# Altium PCB [BB]PowerSuppyandMotorDriver_REV1.2.PcbDoc
Units mm, origin at the board's own origin, x right, y up, seen from the top; angles counter-clockwise.
Board outline 84.18 x 75.54 mm, 2 copper layers (Top Layer, Bottom Layer); 93 components, 73 nets, 295 pads, 202 vias.
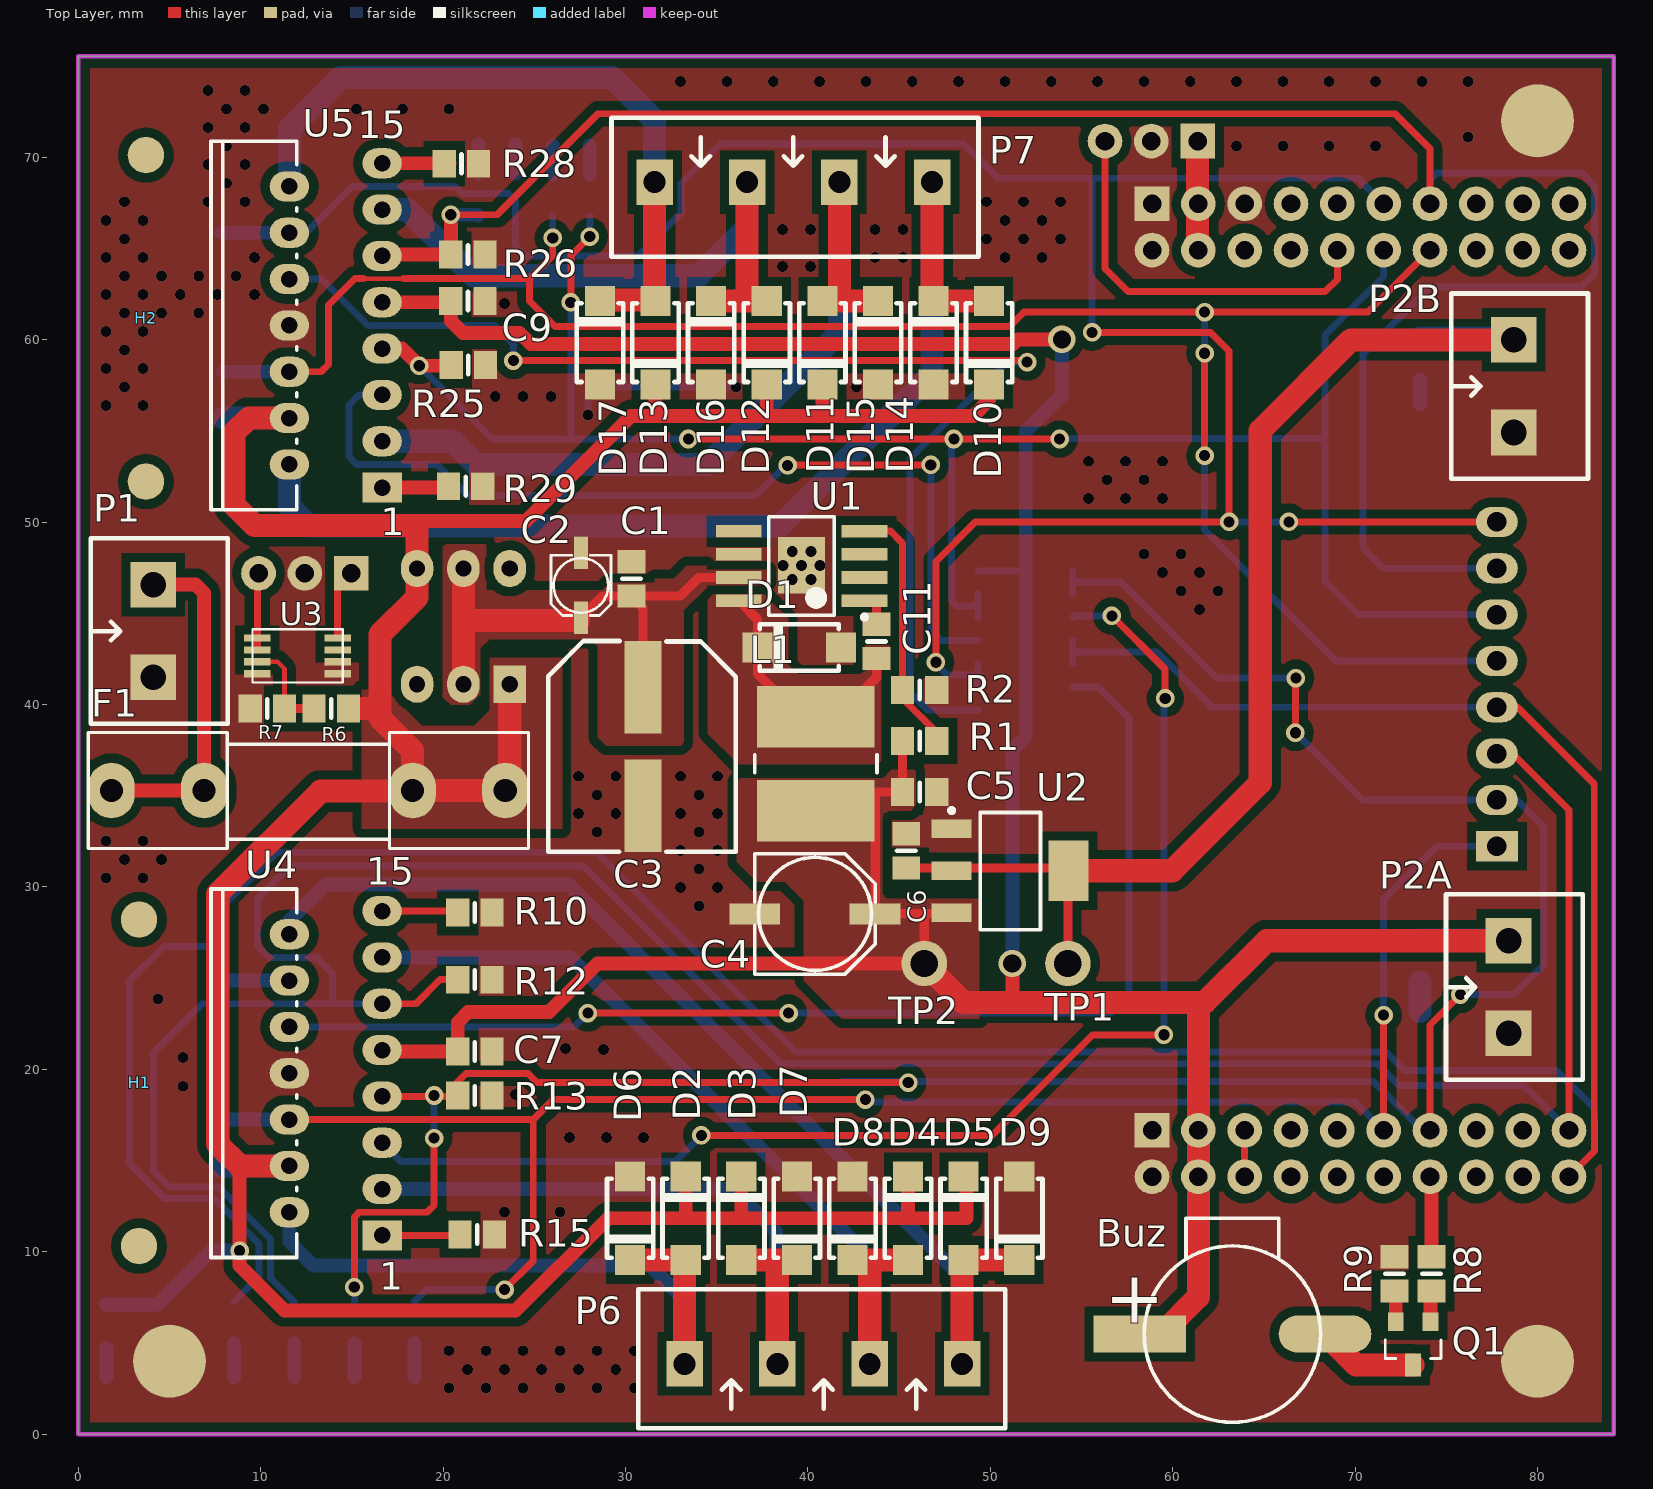
[diagram p0: Top Layer view]
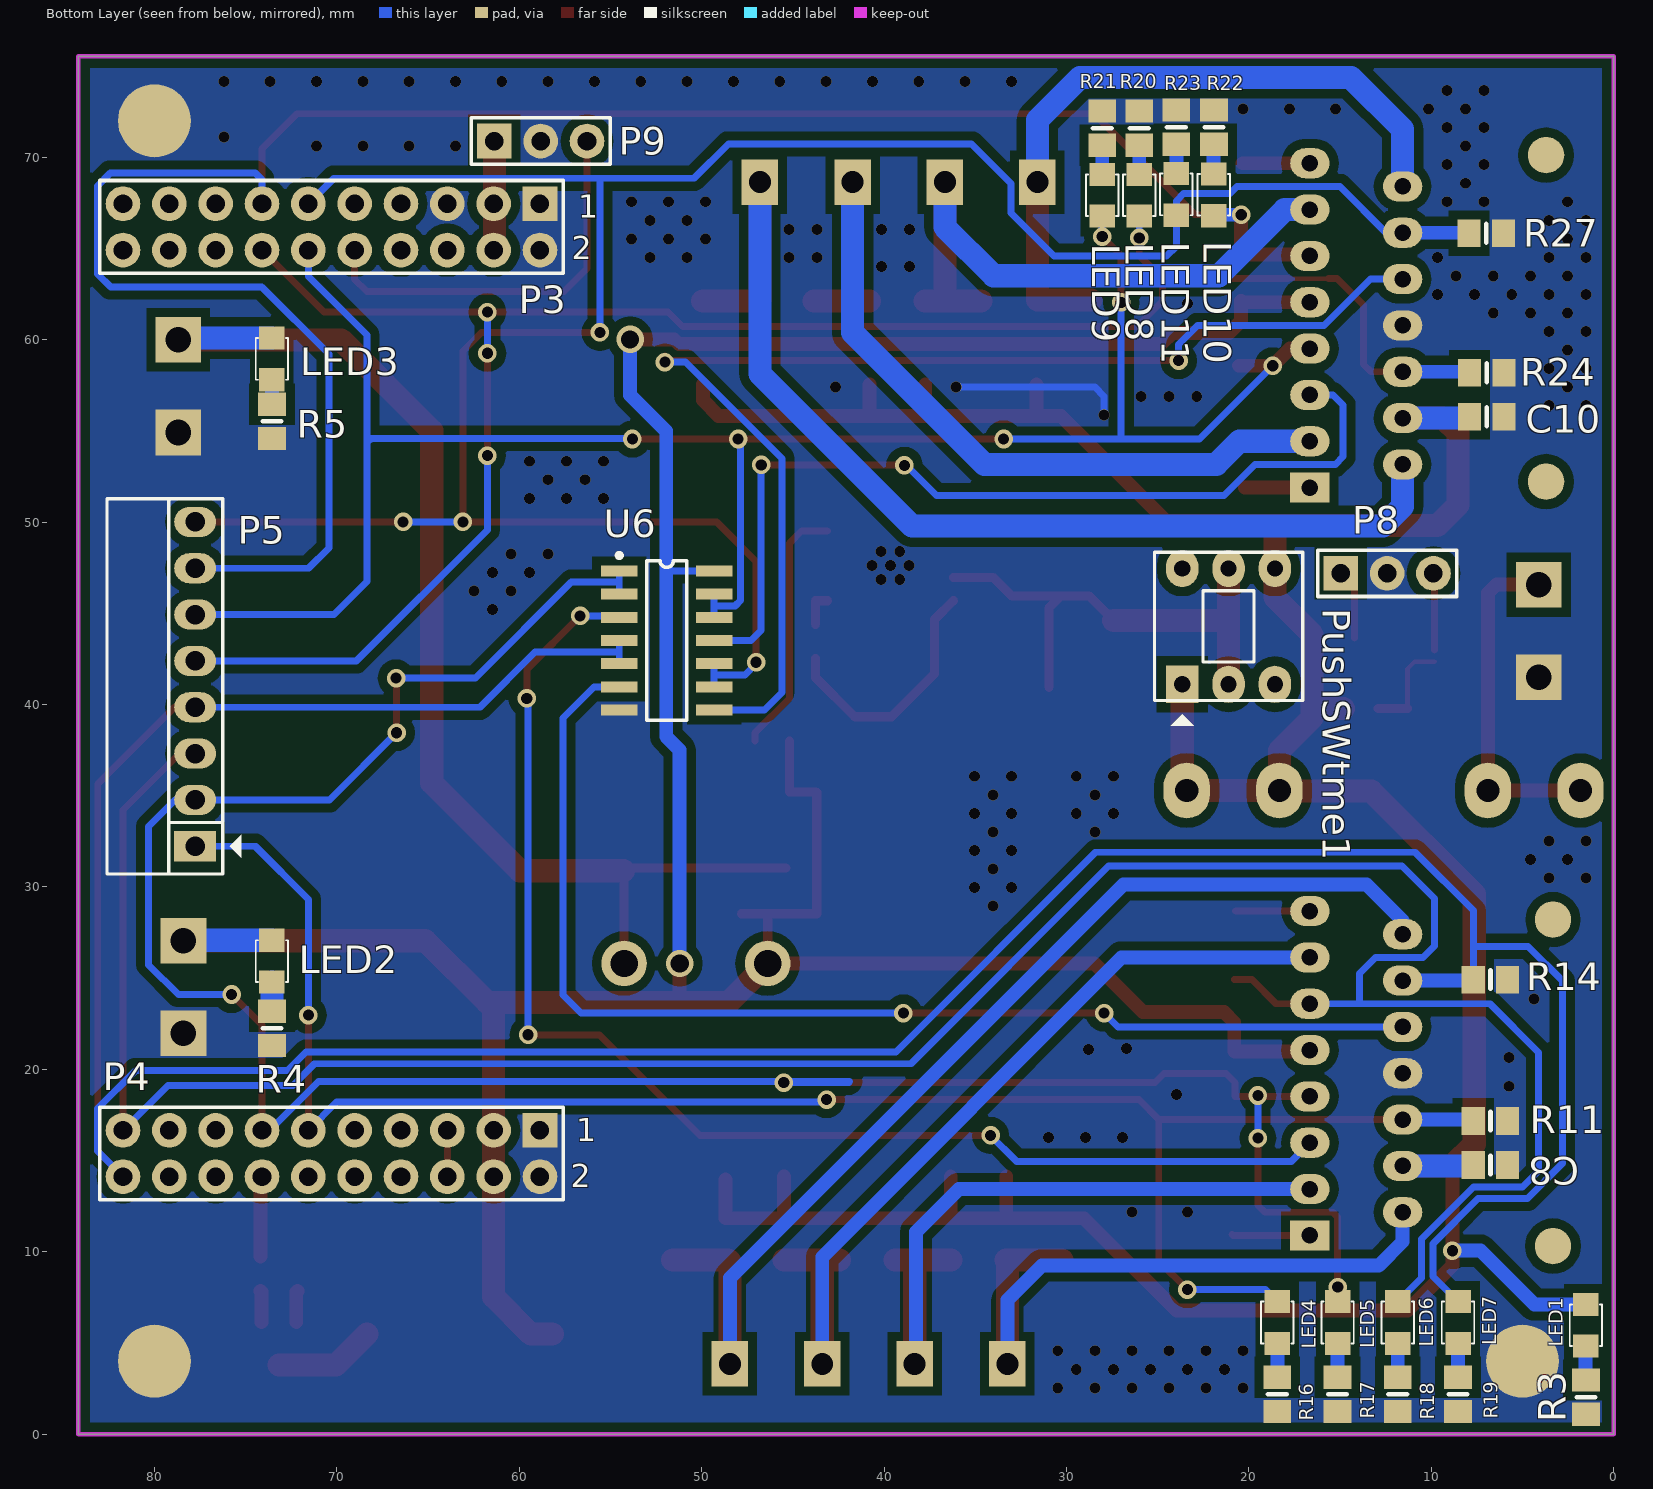
[diagram p1: Bottom Layer view, seen from below]
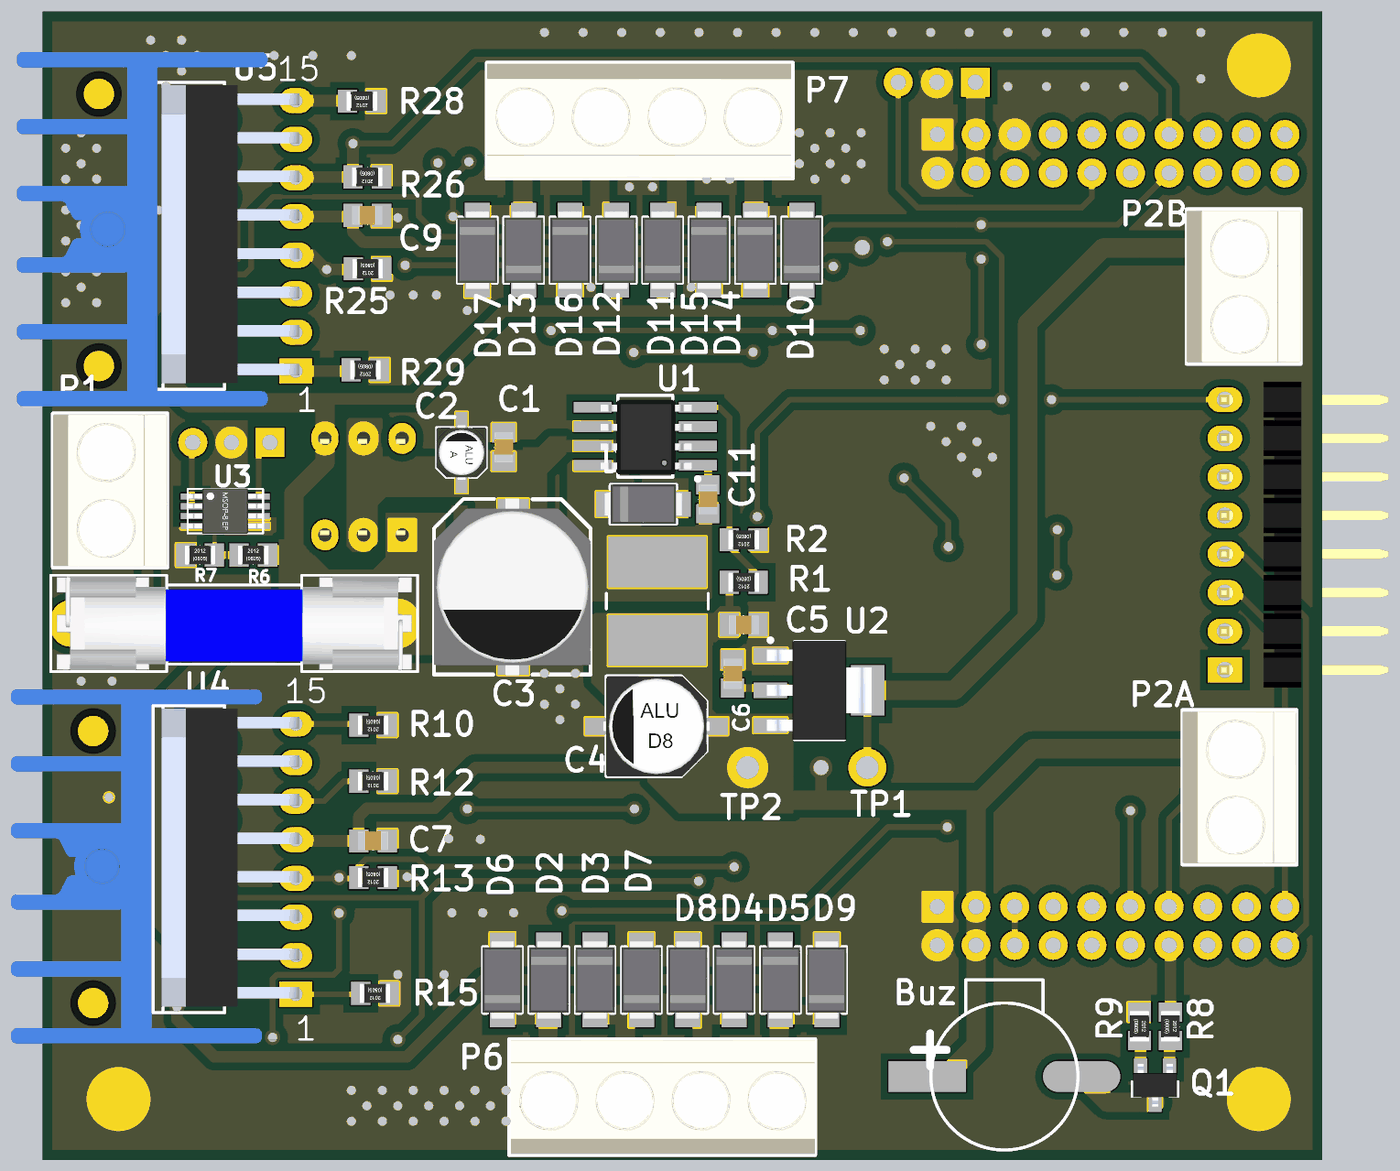
[diagram p2: 3D render of the assembled board from above, using the file's embedded part models]
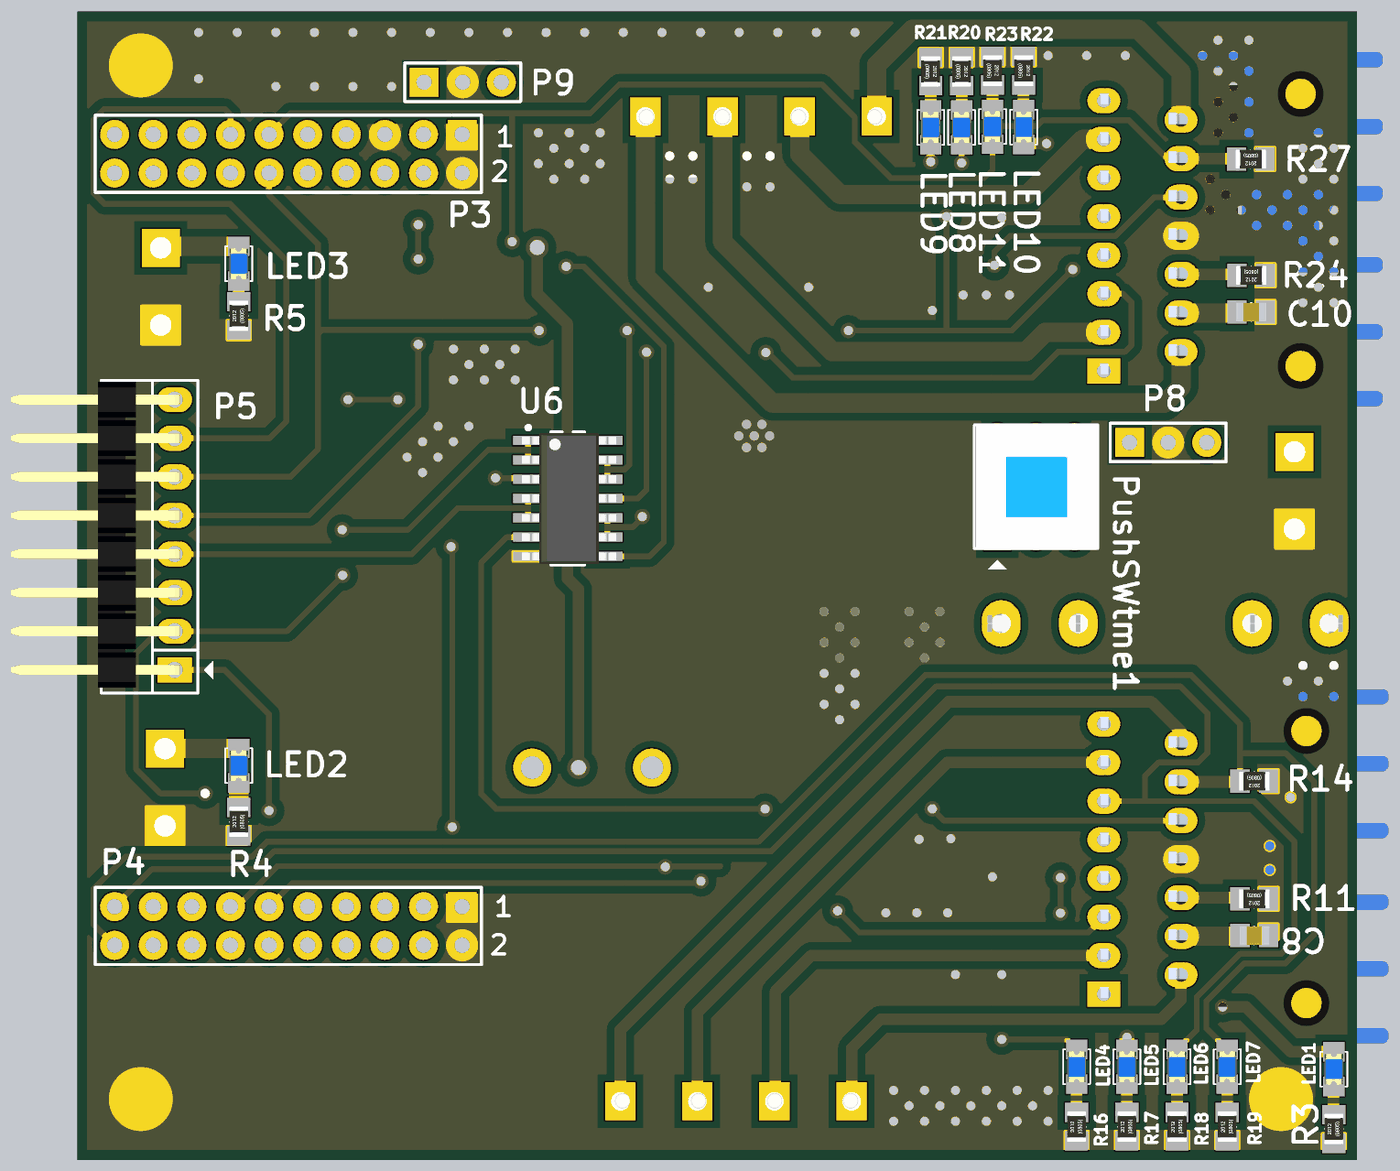
[diagram p3: 3D render of the assembled board from below, using the file's embedded part models]

## Layer stack, top to bottom
Top Solder: solder mask 0.0102, Solder Resist, Dk 3.5
Top Layer: signal copper 0.0356
Dielectric 1: dielectric 0.32, FR-4, Dk 4.8
Bottom Layer: signal copper 0.0356
Bottom Solder: solder mask 0.0102, Solder Resist, Dk 3.5

## Board outline
0,0 0,75.54 84.176,75.54 84.176,0

## Design rules (kind name [scope] priority, off if disabled: settings)
Clearance [All] p1: gap=0.254 except(0.508: Arc-Poly Arc-Region Track-Poly Track-Region SMDPad-Poly SMDPad-Region THPad-Poly THPad-Region Via-Poly Via-Region Fill-Poly Fill-Region Poly-Poly Poly-Region Region-Region)
ComponentClearance [All] p1 off: gap=0.254 collisioncheckmode=3 verticalgap=0.254 showdistances=FALSE
PlaneConnect [All] p1: planeconnectstyle=Direct reliefexpansion=0.508 reliefentries=4 reliefconductorwidth=0.254 reliefairgap=0.254
PolygonConnect [All] p1: connectstyle=Direct reliefconductorwidth=0.254 reliefentries=4 polygonreliefangle="90 Angle" airgapwidth=0.254
RoutingVias [All] p1: holewidth=1.27 width=0.254 viastyle="Through Hole" minholewidth=0.61 minwidth=1.016 maxholewidth=1 maxwidth=2
SolderMaskExpansion [All] p1: expansion=0.102
Width [All] p1: maxlimit=2.54 minlimit=0.254 preferedwidth=0.254 minimp=50.000000 maximp=50.000000 favimp=50.000000
28 further rules are at their usual default settings.

## Components (designator, comment, footprint, x,y, rotation, side; value= is the part's Value field where it differs from the comment)
Buz "Buzzer" "BUZZER SMD" 60.732,5.486 r0 top
C1 "100nF-10%" C0805 30.328,46.888 r270 top
C2 "3.3µF" SM/C_ALU_SA 27.56,44.755 r90 top
C3 "330uF/35V" "Size G" 30.963,40.945 r270 top
C4 "220uF-6.3V" SM/C_ALU_SD8 43.689,28.524 r180 top
C5 "100nF-10%" C0805 46.127,35.204 r180 top
C6 "100nF-10%" C0805 45.391,31.979 r270 top
C7 "100nF-10%" C0805 21.743,20.98 r0 top
C8 "100nF-10%" C0805 6.757,14.757 r0 bottom
C9 "100nF-10%" C0805 21.362,62.128 r0 top
C10 "100nF-10%" C0805 6.96,55.778 r0 bottom
C11 "10nF-10%" C0805 43.765,43.459 r270 top
D1 "SS34" "DO-214AC (SMA)" 41.809,43.129 r180 top
D2 "SS34" "DO-214AC (SMA)" 33.3,9.55 r90 top
D3 "SS34" "DO-214AC (SMA)" 36.348,9.55 r90 top
D4 "SS34" "DO-214AC (SMA)" 45.492,9.55 r90 top
D5 "SS34" "DO-214AC (SMA)" 48.54,9.55 r90 top
D6 "SS14" "DO-214AC (SMA)" 30.252,14.122 r270 top
D7 "SS14" "DO-214AC (SMA)" 39.396,14.122 r270 top
D8 "SS14" "DO-214AC (SMA)" 42.444,14.122 r270 top
D9 "SS14" "DO-214AC (SMA)" 51.588,14.122 r270 top
D10 "SS34" "DO-214AC (SMA)" 49.937,62.128 r270 top
D11 "SS34" "DO-214AC (SMA)" 40.793,62.128 r270 top
D12 "SS34" "DO-214AC (SMA)" 37.745,62.128 r270 top
D13 "SS34" "DO-214AC (SMA)" 31.649,62.128 r270 top
D14 "SS14" "DO-214AC (SMA)" 46.889,57.556 r90 top
D15 "SS14" "DO-214AC (SMA)" 43.841,57.556 r90 top
D16 "SS14" "DO-214AC (SMA)" 34.697,57.556 r90 top
D17 "SS14" "DO-214AC (SMA)" 28.601,57.556 r90 top
F1 "Fuse" FUSE 12.615,35.286 r0 top locked
H1 "Heatsink TO220" "HEATSINK TO-220" 3.328,10.312 r90 top locked
H2 "Heatsink TO220" "HEATSINK TO-220" 3.709,52.222 r90 top locked
L1 "10uH/2A" L6D38 40.438,36.754 r270 top
LED1 "LED SMD" SM-LED-0805-Blue 1.524,7.112 r270 bottom
LED2 "LED SMD" SM-LED-0805-Blue 73.559,27.076 r270 bottom
LED3 "LED SMD" SM-LED-0805-Blue 73.559,60.096 r270 bottom
LED4 "LED SMD" SM-LED-0805-Blue 18.441,7.264 r270 bottom
LED5 "LED SMD" SM-LED-0805-Blue 15.139,7.264 r270 bottom
LED6 "LED SMD" SM-LED-0805-Blue 11.837,7.264 r270 bottom
LED7 "LED SMD" SM-LED-0805-Blue 8.535,7.264 r270 bottom
LED8 "LED SMD" SM-LED-0805-Blue 26.01,66.777 r90 bottom
LED9 "LED SMD" SM-LED-0805-Blue 28.042,66.777 r90 bottom
LED10 "LED SMD" SM-LED-0805-Blue 21.921,66.802 r90 bottom
LED11 "LED SMD" SM-LED-0805-Blue 23.978,66.827 r90 bottom
P1 "Domino 2" "DOMINO 2- 5MM" 4.115,44.036 r90 top locked
P2A "Domino 2" "DOMINO 2- 5MM" 78.411,24.511 r90 top
P2B "Domino 2" "DOMINO 2- 5MM" 78.69,57.455 r90 top
P3 "Header 2X10" "Header 2X10" 58.865,67.456 r0 bottom locked
P4 "Header 2X10" "Header 2X10" 58.865,16.656 r0 bottom locked
P5 "Header 8H" JP8H 77.776,32.233 r90 bottom
P6 "Domino 4" "DOMINO 4 -5mm" 33.242,3.85 r0 top
P7 "Domino 4" "DOMINO 4 -5mm" 46.809,68.642 r180 top
P8 "Header 1X3" "Header 1X3" 14.961,47.193 r180 bottom
P9 "Header 1X3" "Header 1X3" 61.367,70.891 r180 bottom
PushSWtme1 "SW?" "PUSH SW" 21.115,44.286 r90 bottom locked
Q1 "NPN Transistor" SC-43-BCE 73.178,4.978 r180 top
R1 "10k-5%" R0805 46.127,37.998 r180 top
R2 "3.3k-5%" R0805 46.127,40.792 r180 top
R3 "1.5k-5%" R0805 1.524,2.032 r90 bottom
R4 "560k-5%" R0805 73.559,22.25 r90 bottom
R5 "220R-5%" R0805 73.559,55.524 r90 bottom
R6 "100k-5%" R0805 13.865,39.786 r0 top
R7 "12k-5%" R0805 10.365,39.786 r0 top
R8 "1k-5%" R0805 74.194,8.788 r270 top
R9 "1k-5%" R0805 72.162,8.788 r270 top
R10 "0.56R-1%" R0805 21.743,28.6 r180 top
R11 "100k-5%" R0805 6.757,17.17 r0 bottom
R12 "100k-5%" R0805 21.743,24.917 r180 top
R13 "100k-5%" R0805 21.743,18.567 r180 top
R14 "100k-5%" R0805 6.757,24.917 r0 bottom
R15 "0.56R-1%" R0805 21.87,10.947 r180 top
R16 "560k-5%" R0805 18.441,2.184 r90 bottom
R17 "220R-5%" R0805 15.139,2.184 r90 bottom
R18 "1.5k-5%" R0805 11.837,2.184 r90 bottom
R19 "560k-5%" R0805 8.535,2.184 r90 bottom
R20 "220R-5%" R0805 26.01,71.603 r270 bottom
R21 "1.5k-5%" R0805 28.042,71.603 r270 bottom
R22 "560k-5%" R0805 21.921,71.653 r270 bottom
R23 "220R-5%" R0805 23.978,71.653 r270 bottom
R24 "100k-5%" R0805 6.96,58.191 r0 bottom
R25 "100k-5%" R0805 21.388,58.623 r180 top
R26 "100k-5%" R0805 21.362,64.668 r180 top
R27 "100k-5%" R0805 6.986,65.837 r0 bottom
R28 "0.56R-1%" R0805 21.007,69.647 r180 top
R29 "0.56R-1%" R0805 21.235,51.968 r180 top
TP1 "Test Point" "Hole 1.5mm" 54.255,25.806 r0 top
TP2 "Test Point" "Hole 1.5mm" 46.381,25.806 r0 top
U1 "TPS54xx" "SOIC-8 POWERPAD" 39.65,47.625 r180 top
U2 "LM1117-3.3V" SOT223-4N 51.08,30.886 r270 top
U3 "LMV358IDGKR" MSOP-8 12.115,42.786 r270 top
U4 "L298" DIP15SL2 14.115,19.786 r90 top locked
U5 "L298" DIP15SL2 14.115,60.786 r90 top locked
U6 "7400" SO14-150mil 51.918,43.51 r270 bottom

## Footprints (in the part's own frame and the unit in brackets; to place one, negate y for a bottom-side part, rotate by r counter-clockwise, add the part's x,y. Pads: shape width x height; smd on the part's side, far side on the other; paste and mask are expansions set on the pad)
"BUZZER SMD" [mil]
  rect 200x80 smd: 1(-100,0)
  oval 200x80 smd: 2(300,0)
  silkscreen extent -90,-190 290,250
C0805 [mil]
  rect 50x60 smd: 1(-37,0) 2(37,0)
  silkscreen extent 0,-20 0,20, body extent -39,-24 39,25, height 24
DIP15SL2 [mil] "TO, Thru-Hole, Vertical, Heatsink Mounted; 15 Bent Staggered Leads; Pitch 1.27 mm"
  rect 65x85 hole 35.43: 1(-350,-100)
  oval 65x85 hole 35.43: 2(-300,100) 3(-250,-100) 4(-200,100) 5(-150,-100) 6(-100,100) 7(-50,-100) 8(0,100) 9(50,-100) 10(100,100) 11(150,-100) 12(200,100) 13(250,-100) 14(300,100) 15(350,-100)
  silkscreen extent -398,84 398,269, body extent -382,-110 390,247, height 895
"DO-214AC (SMA)" [mil]
  rect 65x65 smd: 1(0,0) 2(180,0)
  silkscreen extent 5,-50 175,50, body extent -12,-51 192,51, height 95
"DOMINO 2- 5MM" [mm]
  rect 2.5x2.5 hole 1.4: 1(-2.54,0) 2(2.54,0)
  silkscreen extent -5.08,-4.08 5.08,3.43, body extent -5,-4.07 5,3.43, height 10
"DOMINO 4 -5mm" [mm]
  rect 2x2.5 hole 1.2: 1(0,0) 2(5.08,0) 3(10.147,0) 4(15.215,0)
  silkscreen extent -2.54,-3.53 17.58,4.09, body extent -2.43,-3.46 17.57,4.04, height 10
FUSE [mil] "De Fuse"
  oval 100x120 hole 50: 1(-425,0) 1(-225,0) 2(225,0) 2(425,0)
  silkscreen extent -475,-125 475,125, body extent -460,-122 460,122, height 378
"Header 1X3" [mil] "Connector; Header; 3 Position"
  rect 75x75 hole 40: 1(0,0)
  round 75 hole 40: 2(100,0) 3(200,0)
  silkscreen extent -50,-50 250,50, body extent -50,-50 250,50, height 276
"Header 2X10" [mil] "Connector; Header; 10x2 Position"
  rect 75x75 hole 40: 1(0,0)
  round 75 hole 40: 2(0,100) 3(100,0) 4(100,100) 5(200,0) 6(200,100) 7(300,0) 8(300,100) 9(400,0) 10(400,100) 11(500,0) 12(500,100) 13(600,0) 14(600,100) 15(700,0) 16(700,100) 17(800,0) 18(800,100) 19(900,0) 20(900,100)
  silkscreen extent -50,-50 950,150, body extent -45,-55 950,150, height 59
"HEATSINK TO-220" [mm]
  round 2 all layers, no hole paste+1 mask+0.5: 0(0,0)
  round 2 all layers, no hole paste+0.5 mask+0.5: 1(17.9,0)
  body extent -2.65,-11.1 20.65,5.4, height 28.01
"Hole 1.5mm" [mm]
  round 2.5 hole 1.5: 0(0,0)
JP8H [mil]
  rect 65x90 hole 42: 1(0,0)
  oval 65x90 hole 42: 2(100,0) 3(200,0) 4(300,0) 5(400,0) 6(500,0) 7(600,0) 8(700,0)
  silkscreen extent -60,-100 750,190, body extent -46,-15 746,424, height 49
L6D38 [mm] "10uH/2A ±20% SMD 6.7x6.7x4mm Precision Wire Wound Inductor, 2-Leads, Body 6.55x6.55mm, IPC Low Density"
  rect 3.35x6.45 smd: 1(-2.575,0) 2(2.575,0)
  silkscreen extent -0.5,-3.35 0.5,3.35, body extent -3.35,-3.35 3.35,3.35, height 4
MSOP-8 [mm]
  rect 0.399x1.45 smd: 1(-0.857,-2.3) 2(-0.207,-2.3) 3(0.443,-2.3) 4(1.093,-2.3) 5(1.093,2.1) 6(0.443,2.1) 7(-0.207,2.1) 8(-0.857,2.1)
  silkscreen extent -1.35,-2.57 1.57,2.39, body extent -1.4,-2.6 1.6,2.4, height 1.01
"PUSH SW" [mil] "SW DTDP - 6Pin 260x300x300 mil"
  rect 80x70 hole 35: 1(-125,100)
  oval 80x70 hole 35: 2(-125,0) 3(-125,-100) 4(125,-100) 5(125,0) 6(125,100)
  silkscreen extent -215,-160 160,160, body extent -158,-159 156,155, height 532
R0805 [mil]
  rect 50x60 smd: 1(-37,0) 2(37,0)
  silkscreen extent 0,-20 0,20, body extent -39,-25 39,25, height 18
SC-43-BCE [mil]
  rect 34x40 smd: B(-37.5,-46.5) E(37.5,-46.5)
  rect 34x50 smd: C(0,46.5)
  silkscreen extent -60,-8 60,33, body extent -57,-52 57,58, height 41
"Size G" [mil]
  rect 200x80 smd: 1(0,0) 2(255.91,0)
  silkscreen extent -100,-205 355,200, body extent -100,-205 356,201, height 402
SM-LED-0805-Blue [mil]
  rect 50x55 smd: 1(0,0) 2(90,0)
  silkscreen extent 0,-35 90,35, body extent 5,-25 85,25, height 43
SM/C_ALU_SA [mil] "1uF -> 4.7uF"
  rect 70x30 smd: 1(0,0) 2(140,0)
  silkscreen extent 5,-65 135,65, body extent -1,-65 141,65, height 213
SM/C_ALU_SD8 [mil] "100uF -> 220uF"
  rect 110x45 smd: 1(0,0) 2(260,0)
  silkscreen extent 0,-130 260,130, body extent -8,-130 268,130, height 303
SO14-150mil [mm] "Small Outline; 14 Leads; Body Width 3.9 mm; Pitch 1.27 mm"
  rect 0.6x2 smd: 1(-3.81,-2.6) 2(-2.54,-2.6) 3(-1.27,-2.6) 4(0,-2.6) 5(1.27,-2.6) 6(2.54,-2.6) 7(3.81,-2.6) 8(3.81,2.6) 9(2.54,2.6) 10(1.27,2.6) 11(0,2.6) 12(-1.27,2.6) 13(-2.54,2.6) 14(-3.81,2.6)
  silkscreen extent -4.78,-2.72 4.38,1.1, body extent -4.32,-3 4.32,3.2, height 1.7
"SOIC-8 POWERPAD" [mm]
  rect 2.6x3.1 smd: 0(0,0)
  rect 2.5x0.7 smd: 1(-3.45,1.93) 2(-3.45,0.66) 3(-3.45,-0.61) 4(-3.45,-1.88) 5(3.45,-1.88) 6(3.45,-0.61) 7(3.45,0.66) 8(3.45,1.93)
  silkscreen extent -3.57,-2.67 1.8,2.96, body extent -3.05,-2.37 2.95,2.53, height 1.7
SOT223-4N [mm] "SOT223, 4-Leads, Body 6.5x3.5mm, Pitch 2.3mm, Lead Span 7mm, IPC Medium Density"
  rect 1x2.2 smd: 1(-2.3,-3.2) 2(0,-3.2) 3(2.3,-3.2)
  rect 3.3x2.2 smd: 4(0,3.2)
  silkscreen extent -3.42,-3.32 3.23,1.68, body extent -3.25,-3.43 3.25,3.46, height 1.72

## Part data
C1 C5 C6 C7 C8 C9 C10: library part 100nF-50V-C0805, "Non-Polarized Capacitor"
C2: library part 4.7uF-25V-Tantalum, "Tantalum Capacitor"
C3: library part C_ALU_330uF_35V, "CAP ALUM 330UF 20% 35V SMD"
C4: library part 220uF-6.3V-Tantalum, "Tantalum Capacitor"
C11: library part 10nF-50V-C0805, "Non-Polarized Capacitor"
D1 D2 D3 D4 D5 D6 D7 D8 D9 D10 D11 D12 D13 D14 D15 D16 D17: library part Diode_SS14, "DIODE SCHOTTKY 40V 1A DO214AC"
H1 H2: "Heatsink-231625W T?n nhi?t Nhôm ki?u TO-220 / Multiwatt, 23x16x25mm"
L1: library part L6D38-100M, "10uH/2A ±20% SMD 6.7x6.7x4mm Inductor"
LED1 LED2 LED3 LED4 LED5 LED6 LED7 LED8 LED9 LED10 LED11: library part LED-SMD-0805
P1 P2A P2B: "Domino, 2-Pin"
P3 P4: "Header, 10-Pin, Dual row"
P5: "Header, 8-Pin, Right Angle"
P6 P7: "Domino 4-Pin"
P8 P9: "Header, 3-Pin"
PushSWtme1: library part PushSWtme, "Push SW 8x8 mm latching ON/OFF"
R1: library part 10k-5%-R0805, "RES 10k OHM 1/8W 5% 0805 SMD"
R2: library part 3.3k-5%-R0805, "RES 3.3k OHM 1/8W 5% 0805 SMD"
R3 R18 R21: library part 1.5k-5%-R0805, "RES 1.5k OHM 1/8W 5% 0805 SMD"
R4 R16 R19 R22: library part 560k-5%-R0603, "RES 560k OHM 1/10W 5% 0603 SMD"
R5 R17 R20 R23: library part 220R-5%-R0805, "RES 220 OHM 1/8W 5% 0805 SMD"
R6 R11 R12 R13 R14 R24 R25 R26 R27: library part 100k-5%-R0805, "RES 100k OHM 1/8W 5% 0805 SMD"
R7: library part 12k-5%-R0805, "RES 12k OHM 1/8W 5% 0805 SMD"
R8 R9: library part 1k-5%-R0805, "RES 1k OHM 1/8W 5% 0805 SMD"
R10 R15 R28 R29: library part 0.56R-1%-R0603, "RES 0.56 OHM 1/10W 1% 0603 SMD"
U1: "IC REG BUCK ADJ 1A 8SOIC"
U2: "800mA Low-Dropout Linear Regulator"
U4 U5: "Dual Full-H Driver"
U6: "Quad 2-Input NAND Gate"

## Free pads (board coordinates)
  round 4 all layers, no hole paste+0.4: 0(80,72) 1(5,4) 1(80,4)

## Via types
v1: diameter 0.6, hole 0.6, Top Layer to Bottom Layer, tented both sides, 161 vias
v2: diameter 1.016, hole 0.61, Top Layer to Bottom Layer, tented both sides, 36 vias
v3: diameter 0.6, hole 0.6, Top Layer to Bottom Layer, 3 vias
v4: diameter 1.5, hole 1, Top Layer to Bottom Layer, tented both sides, 2 vias

## Nets (pads, with @x,y where several pads share a name; then routed paths per layer and width w, separated by ;. In a path a pad name is that pad's centre, name@x,y a point inside that pad or via, vN(x,y) a via of type N, cw(c..) or ccw(c..) an arc to the next point about the centre after c; other vN are vias at no path point)
3V: P4.5 P4.6 | length 2.5
  Top Layer w0.381: P4.6 P4.5
+3V3: C6.2 LED3.1 P2B.2 TP1.0 U2.2 U2.4 | length 66.6
  Top Layer w0.508: C6.2 U2.4@54.128,31.039 ; TP1.0 54.255,30.861 U2.4
  Top Layer w1.27: U2.4 59.97,30.886 64.796,35.712 64.796,55.016 69.775,59.995 P2B.2
  Bottom Layer w1.27: LED3.1 P2B.2@78.588,60.096
+24VDC: C1.2 C2.1 C3.1 PushSWtme1.2 PushSWtme1.5 U1.7 | length 27.7
  Top Layer w0.508: C2.1@27.407,44.602 C2.1 28.754,45.949 C1.2 ; C3.1 30.963,45.314 C1.2 ; U1.7 34.011,46.965 32.995,45.949 C1.2
  Top Layer w1.27: PushSWtme1.2 21.115,44.602 ; PushSWtme1.5 21.115,44.602 ; C2.1@27.407,44.602 21.115,44.602
DIRCTLMOTORA: LED5.1 P4.13 P5.2 R13.2 U4.7 U6.1 U6.2 | length 137.7
  Top Layer w0.381: v2(15.131,8.06) 15.131,11.906 15.392,12.166 19.127,12.166 19.508,12.548 v2(19.508,16.231) ; U4.7 v2@19.457,18.516 ; v2(19.508,18.567) v2@19.457,18.516 ; v2(45.5,19.275) 45.484,19.291 25.147,19.291 24.664,19.774 21.248,19.774 20.752,19.278 20.752,18.516 v2@19.457,18.516 ; v2(66.727,38.456) 66.727,41.427 v2(66.752,41.453) ; P4.13 74.105,22.441 v2(75.769,24.105)
  Bottom Layer w0.381: v2(15.131,8.06) 15.131,7.272 LED5.1 ; v2(19.508,16.231) v2(19.508,18.567) ; v2(45.5,19.275) 45.484,19.291 41.923,19.291 41.885,19.329 71.019,19.329 73.692,16.656 P4.13 ; U6.2 54.518,46.711 ; U6.1 54.518,46.711 ; v2(66.727,38.456) 70.41,34.773 P5.2 78.868,34.773 80.316,33.325 80.316,25.73 78.69,24.105 v2(75.769,24.105) ; v2(66.752,41.453) 62.409,41.453 57.151,46.711 54.518,46.711
DIRCTLMOTORB: LED7.1 P4.20 P5.4 R14.2 U4.12 U6.4 U6.5 | length 177.8
  Top Layer w0.381: P5.4 78.893,39.853 83.11,35.636 83.11,17.26 83.122,17.248 83.122,15.513 P4.20
  Bottom Layer w0.381: R14.2 7.697,26.746 ; LED7.1 9.907,8.636 9.907,10.439 7.43,12.916 4.735,12.916 2.819,14.832 2.819,24.866 4.7,26.746 7.697,26.746 ; U6.5 54.518,42.875 ; U6.4 54.518,42.875 ; P5.4 62.155,39.853 59.132,42.875 54.518,42.875 ; P4.20 83.122,15.513 83.122,17.844 81.027,19.939 72.696,19.939 71.692,20.942 39.358,20.942 28.398,31.902 10.897,31.902 7.697,28.702 7.697,26.746
  Bottom Layer w0.762: R14.2@7.748,24.866 U4.12
DIRCTLMOTORC: LED9.1 P3.12 P5.6 R25.2 U5.7 U6.12 U6.13 | length 109.7
  Top Layer w0.381: v2(27.001,62.052) 27.001,64.618 v2(28.042,65.659) ; v2(33.453,54.559) v2(48.007,54.559) v2(53.798,54.559)
  Top Layer w0.762: U5.7 17.751,59.516 v2(18.695,58.572) R25.2@20.549,58.572
  Bottom Layer w0.381: v2(18.695,58.572) 22.708,54.559 v2(33.453,54.559) ; 27.001,54.635 v2(27.001,62.052) ; v2(28.042,65.659) LED9.1 ; v2(48.007,54.559) 47.874,54.426 47.874,45.7 48.159,45.415 49.318,45.415 ; U6.12 49.318,45.415 ; U6.13 49.318,45.415 ; v2(53.798,54.559) 53.836,54.597 68.111,54.597 68.352,54.356 ; P3.12 71.565,63.462 68.352,60.249 68.352,54.356 ; P5.6 70.156,44.933 68.352,46.736 68.352,54.356
DIRCTLMOTORD: LED11.1 P3.11 P5.8 R27.2 U5.12 U6.9 U6.10 | length 139.6
  Top Layer w0.381: v2(47.016,42.316) 47.016,47.854 49.175,50.013 v2(63.094,50.013) 63.094,59.385 62.078,60.401 v2(55.576,60.401) ; v2(66.371,50.013) P5.8
  Bottom Layer w0.381: U5.12 12.476,65.866 15.016,68.406 20.64,68.406 21.038,68.008 23.585,68.008 23.978,67.615 LED11.1 23.978,65.126 24.512,64.592 30.683,64.592 33.039,66.948 33.039,68.573 35.205,70.739 48.54,70.739 50.426,68.853 55.576,68.853 ; v2(47.016,42.316) 47.016,42.24 47.626,41.631 49.318,41.631 U6.10 ; 49.242,41.631 49.318,41.554 U6.9 ; v2(55.576,60.401) 55.576,68.853 ; v2(63.094,50.013) v2(66.371,50.013) ; P3.11 70.168,68.853 55.576,68.853
  Bottom Layer w0.762: R27.2@7.845,65.866 U5.12
GND: C1.1 C2.2 C3.2 C4.2 C5.1 C6.1 C7.2 C8.1 C9.2 C10.1 D1.1 D6.1 D7.1 D8.1 D9.1 D14.1 D15.1 D16.1 D17.1 P1.1 P2A.1 P2B.1 P3.1 P3.2 P3.5 P4.1 P4.2 P8.2 P9.2 pad.0 pad.1 R2.1 R3.1 R4.1 R5.1 R7.1 R9.1 R10.1 R11.1 R12.1 R13.1 R14.1 R15.1 R16.1 R17.1 R18.1 R19.1 R20.1 R21.1 R22.1 R23.1 R24.1 R25.1 R26.1 R27.1 R28.1 R29.1 U1.0 U1.6 U2.1 U3.4 U3.5 U3.6 U4.8 U5.8 U6.7 | length 9.4
  Bottom Layer w0.381: v1(27.94,55.88) 27.94,56.896 28.448,57.404 v1(36.068,57.404)
  other v1: 20.32,2.54 22.352,2.54 24.384,2.54 26.416,2.54 28.448,2.54 30.48,2.54 21.336,3.556 23.368,3.556 25.4,3.556 27.432,3.556 29.464,3.556 20.32,4.572 22.352,4.572 24.384,4.572 26.416,4.572 28.448,4.572 30.48,4.572 23.368,12.192 26.416,12.192 26.924,16.256 28.956,16.256 30.988,16.256 23.978,18.618 28.804,21.082 26.721,21.133 34.036,28.956 33.02,29.972 35.052,29.972 1.524,30.48 3.556,30.48 34.036,30.988 2.54,31.496 4.572,31.496 33.02,32.004 35.052,32.004 1.524,32.512 3.556,32.512 28.448,33.02 34.036,33.02 27.432,34.036 29.464,34.036 33.02,34.036 35.052,34.036 28.448,35.052 34.036,35.052 27.432,36.068 29.464,36.068 33.02,36.068 35.052,36.068 61.468,45.212 60.452,46.228 62.484,46.228 39.142,46.863 40.158,46.863 59.436,47.244 61.468,47.244 38.634,47.625 39.65,47.625 40.666,47.625 58.42,48.26 60.452,48.26 39.142,48.387 40.158,48.387 55.372,51.308 57.404,51.308 59.436,51.308 56.388,52.324 58.42,52.324 55.372,53.34 57.404,53.34 59.436,53.34 1.524,56.388 3.556,56.388 22.86,56.896 24.384,56.896 25.908,56.896 2.54,57.404 42.672,57.404 1.524,58.42 3.556,58.42 2.54,59.436 1.524,60.452 3.556,60.452 2.54,61.468 4.572,61.468 6.604,61.468 23.368,61.976 1.524,62.484 3.556,62.484 5.588,62.484 7.62,62.484 9.652,62.484 2.54,63.5 4.572,63.5 6.604,63.5 8.636,63.5 38.608,64.008 40.132,64.008 1.524,64.516 3.556,64.516 9.652,64.516 43.688,64.516 45.212,64.516 50.8,64.516 52.832,64.516 2.54,65.532 49.784,65.532 51.816,65.532 53.848,65.532 38.608,66.04 40.132,66.04 43.688,66.04 45.212,66.04 1.524,66.548 3.556,66.548 50.8,66.548 52.832,66.548 2.54,67.564 7.112,67.564 9.144,67.564 49.784,67.564 51.816,67.564 53.848,67.564 8.128,68.58 7.112,69.596 9.144,69.596 8.128,70.612 63.5,70.612 66.04,70.612 68.58,70.612 71.12,70.612 76.2,71.12 7.112,71.628 9.144,71.628 8.128,72.644 10.16,72.644 15.24,72.644 17.78,72.644 20.32,72.644 7.112,73.66 9.144,73.66 33.02,74.168 35.56,74.168 38.1,74.168 40.64,74.168 43.18,74.168 45.72,74.168 48.26,74.168 50.8,74.168 53.34,74.168 55.88,74.168 58.42,74.168 60.96,74.168 63.5,74.168 66.04,74.168 68.58,74.168 71.12,74.168 73.66,74.168 76.2,74.168
  other v3: 5.74,19.075 5.74,20.65 4.369,23.851
NetBuz_2: Buz.2 Q1.C | length 5.5
  Top Layer w1.27: Buz.2 70.041,3.797 Q1.C
NetC11_1: C11.1 U1.1 | length 2
  Top Layer w0.508: U1.1 43.765,45.695 C11.1
NetC11_2: C11.2 D1.2 L1.1 U1.8 | length 13.9
  Top Layer w0.508: U1.8 37.237,44.658 D1.2 37.237,41.681 39.59,39.329 L1.1 41.616,39.329 43.765,41.478 C11.2
NetD2_1: D2.1 D6.2 P6.1 U4.2 | length 36.8
  Top Layer w1.27: D6.2 D2.1 ; P6.1 D2.1@33.242,9.492
  Bottom Layer w0.762: U4.2 11.575,10.549 12.879,9.246 31.344,9.246 33.242,7.348 P6.1
NetD3_1: D3.1 D7.2 P6.2 U4.3 | length 38.5
  Top Layer w1.27: D3.1 D7.2 ; P6.2 38.322,9.492
  Bottom Layer w0.762: U4.3 35.891,13.436 38.253,11.074 38.253,3.919 P6.2
NetD4_1: D4.1 D8.2 P6.3 U4.13 | length 48.1
  Top Layer w1.27: D8.2 D4.1 ; P6.3 43.389,9.48
  Bottom Layer w0.762: U4.13 26.976,26.136 43.389,9.723 P6.3
NetD5_1: D5.1 D9.2 P6.4 U4.14 | length 60.9
  Top Layer w1.27: P6.4 48.457,9.467 D5.1 D9.2
  Bottom Layer w0.762: U4.14 11.575,28.161 13.551,30.137 26.887,30.137 48.457,8.567 P6.4
NetD10_1: D10.1 D14.2 P7.1 U5.2 | length 61.5
  Top Layer w1.27: P7.1 46.809,62.208 D14.2 D10.1
  Bottom Layer w1.27: U5.2 11.575,50.859 12.65,49.784 38.456,49.784 46.809,58.137 P7.1
NetD11_1: D11.1 D15.2 P7.2 U5.3 | length 46.3
  Top Layer w1.27: D11.1 D15.2 ; 41.729,62.208 P7.2
  Bottom Layer w1.27: U5.3 20.52,54.436 21.794,53.162 34.497,53.162 41.729,60.395 P7.2
NetD12_1: D12.1 D16.2 P7.3 U5.13 | length 34.6
  Top Layer w1.27: D16.2 D12.1 ; 36.662,62.188 P7.3
  Bottom Layer w1.27: U5.13 18.031,67.136 21.654,63.513 33.999,63.513 36.662,66.176 P7.3
NetD13_1: D13.1 D17.2 P7.4 U5.14 | length 38.1
  Top Layer w1.27: D17.2@28.656,62.183 31.595,62.183 P7.4
  Bottom Layer w1.27: U5.14 11.575,71.544 14.403,74.371 29.262,74.371 31.595,72.038 P7.4
NetF1_1: F1.1 P1.2 | length 18.9
  Top Layer w0.762: F1.1@1.82,35.286 6.9,35.286 6.9,46.11 6.434,46.576 P1.2
NetLED1_2: LED1.2 R3.2 | length 1.6
  Bottom Layer w0.762: R3.2@1.55,3.124 LED1.2@1.55,4.724
NetLED2_2: LED2.2 R4.2 | length 1.6
  Bottom Layer w1.27: R4.2 LED2.2
NetLED3_2: LED3.2 R5.2 | length 1.3
  Bottom Layer w0.762: R5.2 LED3.2
NetLED4_2: LED4.2 R16.2 | length 1.9
  Bottom Layer w0.762: R16.2 LED4.2
NetLED5_2: LED5.2 R17.2 | length 1.9
  Bottom Layer w0.762: R17.2 LED5.2
NetLED6_2: LED6.2 R18.2 | length 1.9
  Bottom Layer w0.762: R18.2 LED6.2
NetLED7_2: LED7.2 R19.2 | length 1.9
  Bottom Layer w0.762: R19.2 LED7.2
NetLED8_2: LED8.2 R20.2 | length 1.6
  Bottom Layer w0.762: LED8.2 R20.2
NetLED9_2: LED9.2 R21.2 | length 1.6
  Bottom Layer w0.762: LED9.2 R21.2
NetLED10_2: LED10.2 R22.2 | length 1.6
  Bottom Layer w0.762: LED10.2@21.946,69.113 R22.2@21.946,70.714
NetLED11_2: LED11.2 R23.2 | length 1.6
  Bottom Layer w0.762: LED11.2 R23.2
NetP8_1: P8.1 U3.8 | length 3.9
  Top Layer w0.381: U3.8 14.216,46.447 P8.1
NetP8_3: P8.3 U3.1 U3.2 | length 4.2
  Top Layer w0.254: P8.3@9.816,47.127 P8.3
  Top Layer w0.381: U3.2 U3.1 P8.3@9.816,47.127
NetQ1_B: Q1.B R8.2 | length 1.7
  Top Layer w0.762: Q1.B 74.131,7.785 R8.2
NetQ1_E: Q1.E R9.2 | length 1.7
  Top Layer w0.762: R9.2 72.226,7.785 Q1.E
NetR1_1: R1.1 R2.2 U1.4 | length 14
  Top Layer w0.381: U1.4 44.527,49.505 45.187,48.844 R2.2 45.187,40.335 47.067,38.456 R1.1
NetR6_1: R6.1 R7.2 U3.3 | length 5.4
  Top Layer w0.254: U3.3 10.921,42.344 11.305,41.96 R7.2
  Top Layer w0.508: R7.2 R6.1
NetR10_2: R10.2 U4.15 | length 4.1
  Top Layer w0.381: U4.15 R10.2@20.727,28.676
NetR15_2: R15.2 U4.1 | length 4.3
  Top Layer w0.381: U4.1 20.879,10.896 R15.2
NetR28_2: R28.2 U5.15 | length 3.7
  Top Layer w0.762: U5.15 R28.2@20.35,69.676
NetR29_2: R29.2 U5.1 | length 3.6
  Top Layer w0.762: U5.1 R29.2@20.223,51.896
NetU4_5: U4.5 U6.3 | length 72.5
  Top Layer w0.381: v2(34.164,16.383) 50.09,16.383 55.601,21.895 v2(59.513,21.895) ; v2(56.668,44.856) 59.589,41.935 v2(59.589,40.335)
  Bottom Layer w0.381: U4.5 17.671,14.961 32.741,14.961 v2(34.164,16.383) ; U6.3 54.595,44.856 v2(56.668,44.856) ; v2(59.513,21.895) 59.513,40.259 v2(59.589,40.335)
NetU4_10: U4.10 U6.6 | length 65.7
  Top Layer w0.381: v2(27.941,23.089) v2(38.939,23.089)
  Bottom Layer w0.381: U4.10 27.179,22.326 v2(27.941,23.089) ; v2(38.939,23.089) 56.617,23.089 57.608,24.079 57.608,39.268 55.906,40.97 U6.6
NetU5_5: U5.5 U6.11 | length 50.4
  Top Layer w0.381: v2(38.888,53.111) 38.99,53.01 39.117,53.137 v2(46.737,53.137)
  Bottom Layer w0.381: U5.5 15.397,56.976 14.834,56.413 14.834,53.594 15.262,53.166 19.656,53.166 21.362,51.46 37.127,51.46 38.833,53.166 v2(38.888,53.111) ; v2(46.737,53.137) 46.737,44.069 47.296,43.51 U6.11
NetU5_10: U5.10 U6.8 | length 68.8
  Top Layer w0.381: v2(23.851,58.852) 51.715,58.852 51.741,58.826 52.02,59.106 v2(52.02,58.776)
  Bottom Layer w0.381: U5.10 13.335,63.326 15.875,60.786 22.81,60.786 23.851,59.745 v2(23.851,58.852) ; U6.8 46.559,39.7 45.594,40.665 45.594,53.493 50.876,58.776 v2(52.02,58.776)
NRST: P3.6
PA4: P3.16
PA5: P3.15
PA6: P3.18
PA7: P3.17
PC0: P3.8
PC1: P3.7
PC3: P3.9
PC4: P3.20
PC5: P3.19
PC13: P4.12
PC14: P4.9
PC15: P4.10
PE0: P4.17
PE1: P4.18
PE2: P4.15
PE3: P4.16
PH0: P4.7
PH1: P4.8
PWMBUZZER: P4.14 R8.1 | length 4.4
  Top Layer w0.762: P4.14 74.194,14.027 R8.1
READBATRVOLT: P3.10 P9.3 | length 22.1
  Top Layer w0.381: P9.3 56.287,63.906 57.557,62.636 68.352,62.636 69.025,63.309 P3.10
SPEEDCTLMOTORA: LED4.1 P4.11 P5.1 R11.2 U4.6 | length 100.2
  Top Layer w0.381: U4.6 24.943,17.246 ; v2(23.369,7.925) 24.943,9.499 24.943,17.246 ; v2(43.155,18.339) 26.036,18.339 24.943,17.246 ; P4.11 v2(71.565,22.974)
  Bottom Layer w0.381: LED4.1 19.102,7.925 v2(23.369,7.925) ; v2(43.155,18.339) 43.282,18.212 70.01,18.212 P4.11 ; v2(71.565,22.974) 71.565,29.324 74.474,32.233 P5.1
  Bottom Layer w0.762: R11.2@7.773,17.246 U4.6
SPEEDCTLMOTORB: LED6.1 P4.19 P5.3 R12.2 U4.11 | length 147.2
  Top Layer w0.381: U4.11 18.517,23.596 19.838,24.917 R12.2 ; P5.3 78.639,37.313 81.725,34.227 P4.19
  Bottom Layer w0.381: LED6.1 10.542,8.56 10.542,10.702 7.693,13.551 4.998,13.551 4.116,14.434 4.116,20.93 6.782,23.596 13.945,23.596 ; U4.11 13.945,23.596 ; P4.19 79.255,19.126 72.407,19.126 71.226,20.307 38.52,20.307 27.687,31.14 11.609,31.14 9.831,29.362 9.831,26.772 10.466,26.136 13.057,26.136 13.945,25.248 13.945,23.596
SPEEDCTLMOTORC: LED8.1 P3.14 P5.5 R24.2 U5.6 | length 108.7
  Top Layer w0.254: 15.647,63.348 17.832,63.348
  Top Layer w0.381: U5.6 13.315,58.246 13.717,58.649 13.717,61.9 15.165,63.348 15.647,63.348 ; 17.832,63.348 24.74,63.348 ; v2(26.01,65.583) 26.01,64.618 24.74,63.348 ; v2(61.748,53.645) v2(61.748,59.258) ; P3.14 70.708,61.519 51.841,61.519 51.053,60.731 26.137,60.731 24.74,62.128 24.74,63.348
  Bottom Layer w0.381: v2(26.01,65.583) LED8.1 ; v2(61.748,53.645) 61.748,49.581 68.936,42.393 P5.5 ; v2(61.748,59.258) 61.672,59.334 61.748,59.411 v2(61.748,61.519)
  Bottom Layer w0.762: R24.2@7.955,58.246 U5.6
SPEEDCTLMOTORD: LED10.1 P3.13 P5.7 R26.2 U5.11 | length 115.7
  Top Layer w0.381: v2(20.422,66.853) 22.962,66.853 28.5,72.39 72.188,72.39 74.105,70.472 P3.13
  Top Layer w0.762: U5.11@16.727,64.668 R26.2 v2(20.422,66.853)
  Bottom Layer w0.381: P3.13 74.105,68.77 74.474,69.139 82.424,69.139 83.122,68.44 83.122,63.614 82.398,62.89 74.118,62.89 70.435,59.207 70.435,48.59 71.553,47.473 P5.7
  Bottom Layer w0.762: v2(20.422,66.853) 21.87,66.853 LED10.1
VCC: Buz.1 C4.1 C5.2 C7.1 C9.1 L1.2 LED2.1 P2A.2 P4.3 P4.4 R1.2 TP2.0 U2.3 U4.9 U5.9 U6.14 | length 188.7
  Top Layer w0.508: R1.2 C5.2 43.714,35.204 43.689,35.179 C4.1 46.381,28.524 ; TP2.0 46.381,28.524 ; U2.3@47.818,28.524 46.381,28.524
  Top Layer w0.762: U5.9 C9.1@20.35,62.056 ; U4.9@16.731,20.98 C7.1 20.803,22.581 21.362,23.139 25.807,23.139 28.474,25.806 TP2.0 ; C9.1 20.422,61.036 21.083,60.376 24.196,60.376 24.806,59.766 51.255,59.766 51.509,60.02 v4(53.925,60.02) ; 51.207,23.673 v4(51.207,25.806)
  Top Layer w1.27: TP2.0 48.515,23.673 51.207,23.673 53.364,23.673 53.369,23.667 61.768,23.667 65.152,27.051 P2A.2 ; Buz.1 59.361,5.486 61.405,7.531 P4.4 P4.3 61.405,23.66
  Bottom Layer w0.381: U6.14 51.893,47.32
  Bottom Layer w0.762: v4(51.207,25.806) 51.207,37.516 51.944,38.252 51.944,54.991 53.925,56.972 v4(53.925,60.02)
  Bottom Layer w1.27: LED2.1 P2A.2@78.385,27.076
VDD: P3.3 P3.4 P9.1 | length 6
  Top Layer w1.27: P9.1 61.367,64.954 P3.4
VIN: C8.2 C10.2 D2.2 D3.2 D4.2 D5.2 D10.2 D11.2 D12.2 D13.2 F1.2 LED1.1 PushSWtme1.1 PushSWtme1.4 R6.2 U4.4 U5.4 | length 194.2
  Top Layer w0.762: 8.84,14.706 v2(8.84,10.058) 8.84,9.245 11.304,6.782 23.978,6.782 29.033,11.836 48.693,11.836 D5.2@48.693,13.97 ; PushSWtme1.4 18.575,50.063 24.537,50.063 30.303,55.829 31.649,55.829 ; D13.2 31.649,55.829 ; 33.3,11.887 D2.2 ; 36.348,11.963 D3.2 ; D12.2 37.745,55.829 ; D11.2 40.793,55.829 ; 45.492,11.963 D4.2 ; D10.2 49.937,56.693 49.074,55.829 40.793,55.829 ; 31.649,55.829 37.745,55.829 ; 37.745,55.829 40.793,55.829
  Top Layer w1.27: U4.4 8.84,14.706 7.646,15.9 7.646,29.616 13.285,35.255 F1.2@18.299,35.255 ; U5.4 9.352,55.706 8.535,54.889 8.535,50.952 9.678,49.809 18.575,49.809 PushSWtme1.4 18.575,45.879 16.536,43.84 16.536,39.268 ; R6.2 16.536,39.786 16.536,39.268 ; PushSWtme1.1 23.655,35.531 23.41,35.286 18.33,35.286 18.33,37.474 16.536,39.268
  Bottom Layer w0.762: LED1.1 4.343,7.112 7.29,10.058 v2(8.84,10.058)
  Bottom Layer w1.27: C8.2@7.748,14.706 U4.4 ; C10.2@7.972,55.706 U5.4
pads on no net: H1.0 H1.1 H2.0 H2.1 PushSWtme1.3 PushSWtme1.6 U1.2 U1.3 U1.5 U3.7

## Polygon pours and split planes (outlines as drawn)
GND on Top Layer "TOP_GND" (solid, remove dead copper, pour order 8): -4.318,80.061 88.392,80.061 90.475,77.978 90.475,-3.861 87.96,-6.375 -3.912,-6.375 -7.671,-2.616 -7.671,76.302 -4.318,79.654
VCC on Top Layer "VCC" (solid, remove dead copper, pour order 6): 36.323,35.966 44.121,35.966 44.476,36.322 44.578,36.424 45.822,36.424 46.102,36.144 46.102,34.646 45.645,34.188 44.451,34.188 44.07,33.807 44.07,29.616 44.324,29.362 49.302,29.362 49.404,29.261 49.404,22.784 41.86,22.784 39.777,24.867 39.777,29.235 38.736,30.277 37.186,30.277 36.094,31.369 36.094,35.763 36.323,35.992
NetC11_2 on Top Layer " NETC11_2" (solid, remove dead copper, pour order 4): 34.875,46.076 37.567,46.076 37.974,45.669 38.914,44.729 38.914,42.189 39.447,41.656 42.876,41.656 43.003,41.783 43.003,43.409 44.679,43.409 44.679,42.012 44.197,41.529 44.019,41.351 44.019,36.932 43.816,36.728 36.196,36.728 34.519,38.405 34.519,45.491 34.519,45.745 34.824,46.05
+24VDC on Top Layer "24V" (solid, remove dead copper, pour order 2): 20.143,48.793 22.302,48.793 22.378,48.717 22.378,46.279 28.728,46.279 29.312,46.863 29.338,46.888 32.64,46.888 33.351,47.6 37.593,47.6 37.771,47.422 37.771,46.711 37.491,46.431 35.002,46.431 34.469,46.431 33.199,45.161 33.199,37.922 33.021,37.744 28.931,37.744 28.474,38.202 28.474,43.205 28.093,43.586 22.556,43.586 22.048,43.078 22.048,40.564 21.464,39.98 20.422,39.98 19.991,40.411 19.991,48.387 19.991,48.641 20.143,48.793
VIN on Top Layer "VIN" (solid, pour order 0): 22.531,42.57 26.518,42.57 26.518,33.198 15.546,33.198 15.546,34.442 15.546,40.818 16.841,40.818 18.822,38.837 21.718,38.837 22.378,39.497 22.556,39.675 22.556,42.52
GND on Bottom Layer "BOT_GND" (solid, remove dead copper, pour order 12): -0.991,77.546 84.226,77.546 87.147,74.625 87.147,1.143 83.388,-2.616 1.524,-2.616 -1.803,0.711 -1.803,76.302 -0.559,77.546

## Keep-outs
Keep-Out Layer:
  the board outline again, w0.254

## Text inside footprints (layer, text, board x,y; h text height)
Buz: Top Overlay "+" at 56.287,6.121 h2.86
P3: Bottom Overlay "2" at 57.125,64.414 h1.27; Bottom Overlay "1" at 56.769,66.7 h1.27
P4: Bottom Overlay "2" at 57.175,13.538 h1.27; Bottom Overlay "1" at 56.871,16.053 h1.27
U4: Top Overlay "15" at 15.799,30.124 h1.5; Top Overlay "1" at 16.51,7.925 h1.5
U5: Top Overlay "15" at 15.316,71.044 h1.5; Top Overlay "1" at 16.586,49.276 h1.5